# Altium PCB RPi-CM4-Union.PcbDoc
Units mil, origin at the board's own origin, x right, y up, seen from the top; angles counter-clockwise.
Board outline not stored, 2 copper layers (Top Layer, Bottom Layer); 6 components, 0 nets, 204 pads, 0 vias.
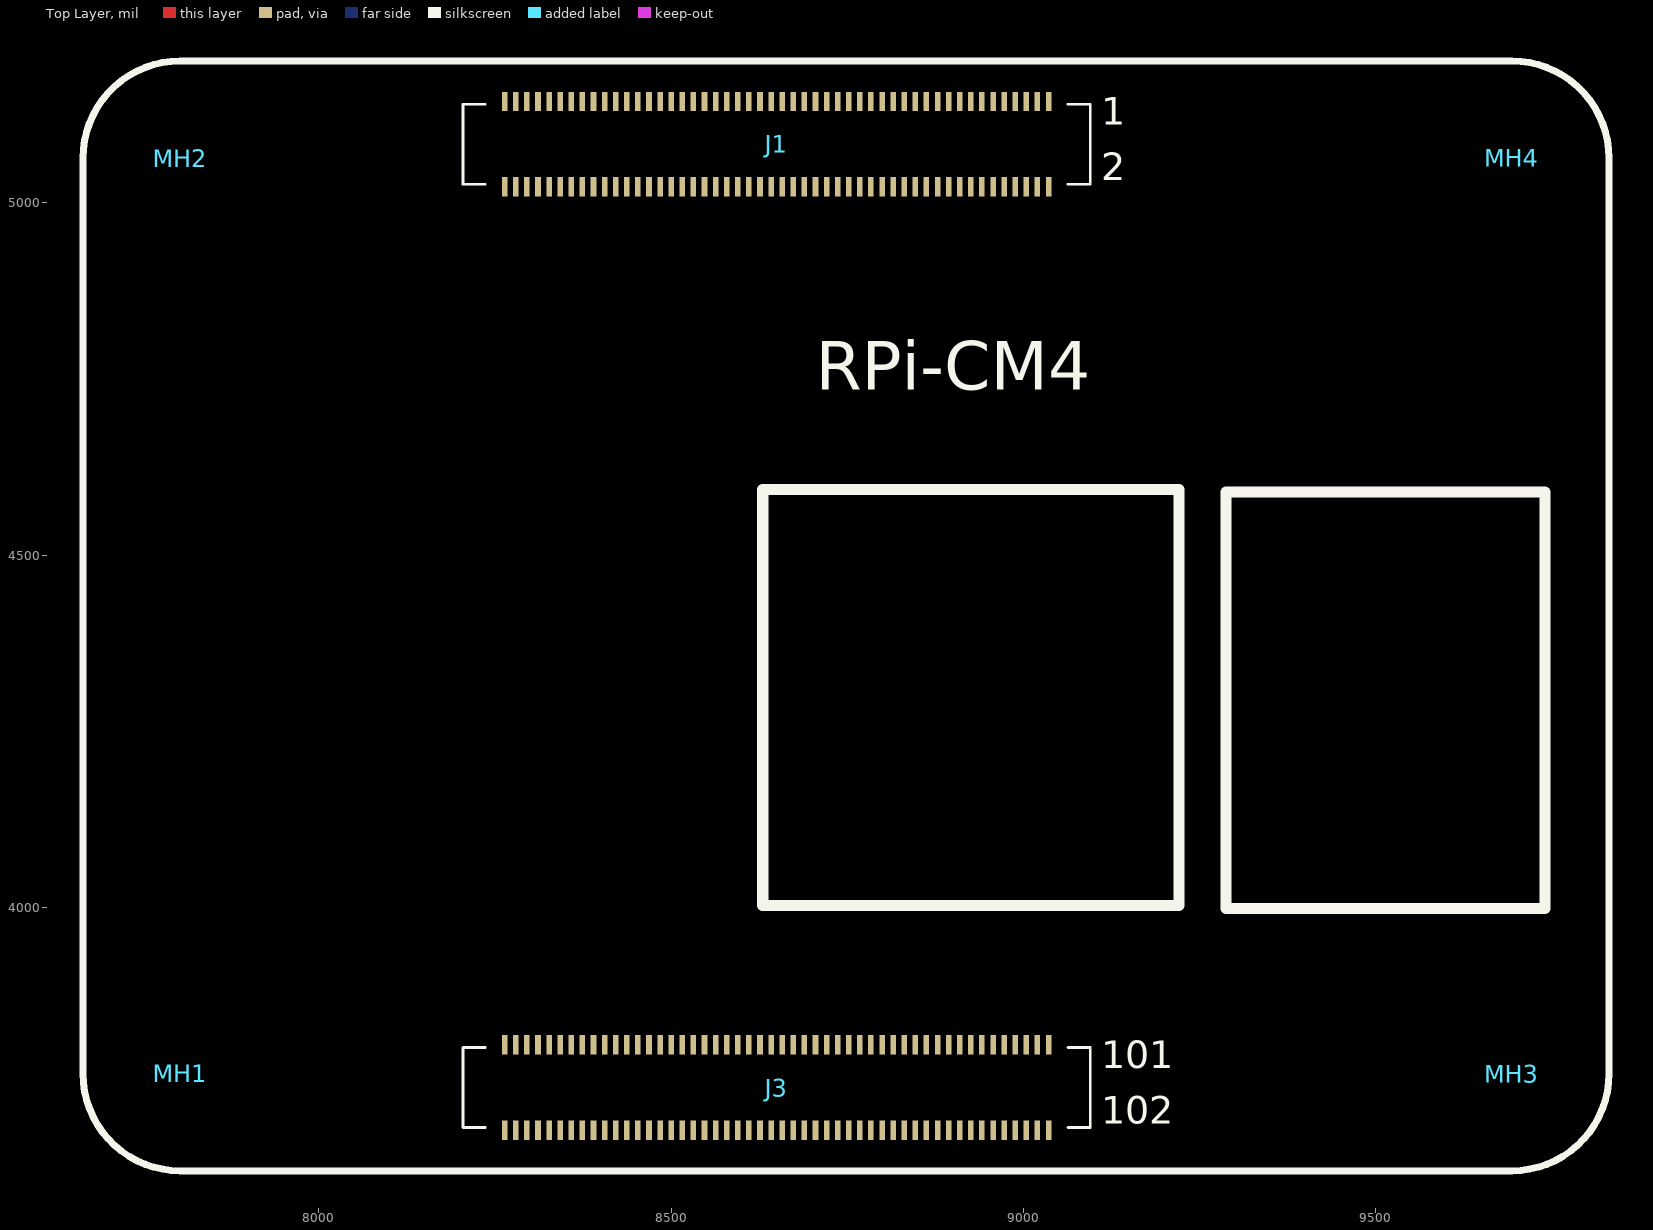
[diagram p0: Top Layer view]
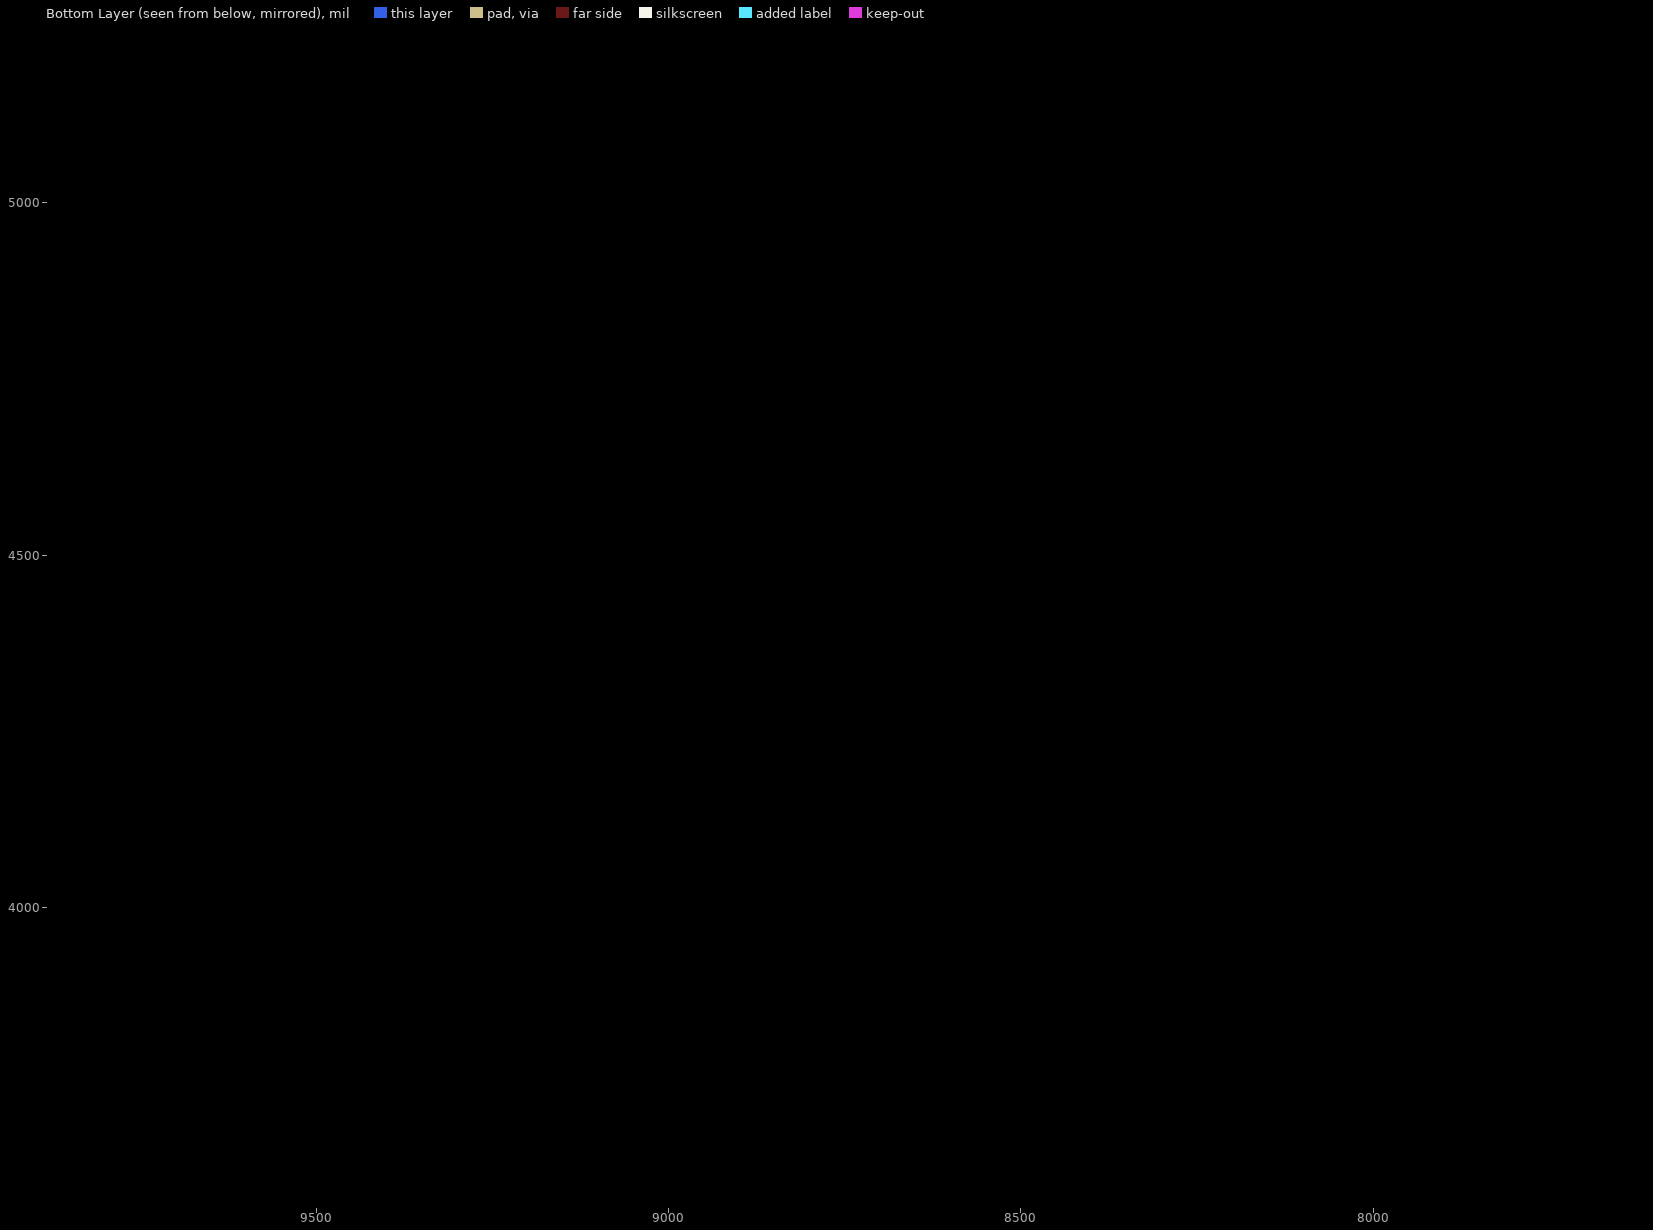
[diagram p1: Bottom Layer view, seen from below]

## Layer stack, top to bottom
Top Solder: solder mask 0.4, Solder Resist, Dk 3.5
Top Layer: signal copper 1.4
Dielectric 1: dielectric 12.6, FR-4, Dk 4.8
Bottom Layer: signal copper 1.4
Bottom Solder: solder mask 0.4, Solder Resist, Dk 3.5

## Components (designator, comment, footprint, x,y, rotation, side; value= is the part's Value field where it differs from the comment)
J1 "DF40C-100DS-0.4V" DF40C100DS04V51(CM4-A) 8649.8,5082.87 r0 top
J3 "DF40C-100DS-0.4V" DF40C100DS04V51(CM4-B) 8649.8,3744.29 r0 top locked
MH1 "MH" M2.5 7803.35,3763.98 r0 top
MH2 "MH" M2.5 7803.35,5063.19 r0 top
MH3 "MH" M2.5 9693.11,3763.98 r0 top
MH4 "MH" M2.5 9693.11,5063.19 r0 top

## Footprints (in the part's own frame and the unit in brackets; to place one, negate y for a bottom-side part, rotate by r counter-clockwise, add the part's x,y. Pads: shape width x height; smd on the part's side, far side on the other; paste and mask are expansions set on the pad)
DF40C100DS04V51(CM4-A) [mm] "DF40C100DS04V51"
  rect 0.2x0.7 smd: 1(9.8,1.54) 2(9.8,-1.54) 3(9.4,1.54) 4(9.4,-1.54) 5(9,1.54) 6(9,-1.54) 7(8.6,1.54) 8(8.6,-1.54) 9(8.2,1.54) 10(8.2,-1.54) 11(7.8,1.54) 12(7.8,-1.54) 13(7.4,1.54) 14(7.4,-1.54) 15(7,1.54) 16(7,-1.54) 17(6.6,1.54) 18(6.6,-1.54) 19(6.2,1.54) 20(6.2,-1.54) 21(5.8,1.54) 22(5.8,-1.54) 23(5.4,1.54) 24(5.4,-1.54) 25(5,1.54) 26(5,-1.54) 27(4.6,1.54) 28(4.6,-1.54) 29(4.2,1.54) 30(4.2,-1.54) 31(3.8,1.54) 32(3.8,-1.54) 33(3.4,1.54) 34(3.4,-1.54) 35(3,1.54) 36(3,-1.54) 37(2.6,1.54) 38(2.6,-1.54) 39(2.2,1.54) 40(2.2,-1.54) 41(1.8,1.54) 42(1.8,-1.54) 43(1.4,1.54) 44(1.4,-1.54) 45(1,1.54) 46(1,-1.54) 47(0.6,1.54) 48(0.6,-1.54) 49(0.2,1.54) 50(0.2,-1.54) 51(-0.2,1.54) 52(-0.2,-1.54) 53(-0.6,1.54) 54(-0.6,-1.54) 55(-1,1.54) 56(-1,-1.54) 57(-1.4,1.54) 58(-1.4,-1.54) 59(-1.8,1.54) 60(-1.8,-1.54) 61(-2.2,1.54) 62(-2.2,-1.54) 63(-2.6,1.54) 64(-2.6,-1.54) 65(-3,1.54) 66(-3,-1.54) 67(-3.4,1.54) 68(-3.4,-1.54) 69(-3.8,1.54) 70(-3.8,-1.54) 71(-4.2,1.54) 72(-4.2,-1.54) 73(-4.6,1.54) 74(-4.6,-1.54) 75(-5,1.54) 76(-5,-1.54) 77(-5.4,1.54) 78(-5.4,-1.54) 79(-5.8,1.54) 80(-5.8,-1.54) 81(-6.2,1.54) 82(-6.2,-1.54) 83(-6.6,1.54) 84(-6.6,-1.54) 85(-7,1.54) 86(-7,-1.54) 87(-7.4,1.54) 88(-7.4,-1.54) 89(-7.8,1.54) 90(-7.8,-1.54) 91(-8.2,1.54) 92(-8.2,-1.54) 93(-8.6,1.54) 94(-8.6,-1.54) 95(-9,1.54) 96(-9,-1.54) 97(-9.4,1.54) 98(-9.4,-1.54) 99(-9.8,1.54) 100(-9.8,-1.54)
  silkscreen extent -11.3,-1.44 11.3,1.44, body extent -11.29,-1.69 11.31,1.69, height 1.4
DF40C100DS04V51(CM4-B) [mm] "DF40C100DS04V51"
  rect 0.2x0.7 smd: 101(9.8,1.54) 102(9.8,-1.54) 103(9.4,1.54) 104(9.4,-1.54) 105(9,1.54) 106(9,-1.54) 107(8.6,1.54) 108(8.6,-1.54) 109(8.2,1.54) 110(8.2,-1.54) 111(7.8,1.54) 112(7.8,-1.54) 113(7.4,1.54) 114(7.4,-1.54) 115(7,1.54) 116(7,-1.54) 117(6.6,1.54) 118(6.6,-1.54) 119(6.2,1.54) 120(6.2,-1.54) 121(5.8,1.54) 122(5.8,-1.54) 123(5.4,1.54) 124(5.4,-1.54) 125(5,1.54) 126(5,-1.54) 127(4.6,1.54) 128(4.6,-1.54) 129(4.2,1.54) 130(4.2,-1.54) 131(3.8,1.54) 132(3.8,-1.54) 133(3.4,1.54) 134(3.4,-1.54) 135(3,1.54) 136(3,-1.54) 137(2.6,1.54) 138(2.6,-1.54) 139(2.2,1.54) 140(2.2,-1.54) 141(1.8,1.54) 142(1.8,-1.54) 143(1.4,1.54) 144(1.4,-1.54) 145(1,1.54) 146(1,-1.54) 147(0.6,1.54) 148(0.6,-1.54) 149(0.2,1.54) 150(0.2,-1.54) 151(-0.2,1.54) 152(-0.2,-1.54) 153(-0.6,1.54) 154(-0.6,-1.54) 155(-1,1.54) 156(-1,-1.54) 157(-1.4,1.54) 158(-1.4,-1.54) 159(-1.8,1.54) 160(-1.8,-1.54) 161(-2.2,1.54) 162(-2.2,-1.54) 163(-2.6,1.54) 164(-2.6,-1.54) 165(-3,1.54) 166(-3,-1.54) 167(-3.4,1.54) 168(-3.4,-1.54) 169(-3.8,1.54) 170(-3.8,-1.54) 171(-4.2,1.54) 172(-4.2,-1.54) 173(-4.6,1.54) 174(-4.6,-1.54) 175(-5,1.54) 176(-5,-1.54) 177(-5.4,1.54) 178(-5.4,-1.54) 179(-5.8,1.54) 180(-5.8,-1.54) 181(-6.2,1.54) 182(-6.2,-1.54) 183(-6.6,1.54) 184(-6.6,-1.54) 185(-7,1.54) 186(-7,-1.54) 187(-7.4,1.54) 188(-7.4,-1.54) 189(-7.8,1.54) 190(-7.8,-1.54) 191(-8.2,1.54) 192(-8.2,-1.54) 193(-8.6,1.54) 194(-8.6,-1.54) 195(-9,1.54) 196(-9,-1.54) 197(-9.4,1.54) 198(-9.4,-1.54) 199(-9.8,1.54) 200(-9.8,-1.54)
  silkscreen extent -11.3,-1.44 11.3,1.44, body extent -11.3,-1.7 11.3,1.68, height 1.4
M2.5 [mm]
  round 2.5 hole 2.7 unplated paste+0 mask+1.75: M2.5(0,0)
  Multi-Layer pour cut-out: 0,-3 -0.197,-3 -0.587,-2.949 -0.966,-2.847 -1.33,-2.696 -1.67,-2.5 -1.982,-2.26 -2.26,-1.982 -2.5,-1.67 -2.696,-1.33 -2.847,-0.966 -2.949,-0.587 -3,-0.197 -3,0 -3,0.197 -2.949,0.587 -2.847,0.966 -2.696,1.33 -2.5,1.67 -2.26,1.982 -1.982,2.26 -1.67,2.5 -1.33,2.696 -0.966,2.847 -0.587,2.949 -0.197,3 0,3 0.197,3 0.587,2.949 0.966,2.847 1.33,2.696 1.67,2.5 1.982,2.26 2.26,1.982 2.5,1.67 2.696,1.33 2.847,0.966 2.949,0.587 3,0.197 3,0 3,-0.197 2.949,-0.587 2.847,-0.966 2.696,-1.33 2.5,-1.67 2.26,-1.982 1.982,-2.26 1.67,-2.5 1.33,-2.696 0.966,-2.847 0.587,-2.949 0.197,-3 0,-3

## Part data
J1: library part Module_RPi-CM4-GPIO, "树莓派CM4-A GPIO  DF40C-100DS-0.4V座子"
J3: library part Module_RPi-CM4-HighSpeedSerial, "树莓派CM4-B High Speed Serial  DF40C-100DS-0.4V座子"
MH1 MH2 MH3 MH4: "安装孔-附加安装铜柱信息"

## Nets (pads, with @x,y where several pads share a name; then routed paths per layer and width w, separated by ;. In a path a pad name is that pad's centre, name@x,y a point inside that pad or via, vN(x,y) a via of type N, cw(c..) or ccw(c..) an arc to the next point about the centre after c; other vN are vias at no path point)
pads on no net: J1.1 J1.2 J1.3 J1.4 J1.5 J1.6 J1.7 J1.8 J1.9 J1.10 J1.11 J1.12 J1.13 J1.14 J1.15 J1.16 J1.17 J1.18 J1.19 J1.20 J1.21 J1.22 J1.23 J1.24 J1.25 J1.26 J1.27 J1.28 J1.29 J1.30 J1.31 J1.32 J1.33 J1.34 J1.35 J1.36 J1.37 J1.38 J1.39 J1.40 J1.41 J1.42 J1.43 J1.44 J1.45 J1.46 J1.47 J1.48 J1.49 J1.50 J1.51 J1.52 J1.53 J1.54 J1.55 J1.56 J1.57 J1.58 J1.59 J1.60 J1.61 J1.62 J1.63 J1.64 J1.65 J1.66 J1.67 J1.68 J1.69 J1.70 J1.71 J1.72 J1.73 J1.74 J1.75 J1.76 J1.77 J1.78 J1.79 J1.80 J1.81 J1.82 J1.83 J1.84 J1.85 J1.86 J1.87 J1.88 J1.89 J1.90 J1.91 J1.92 J1.93 J1.94 J1.95 J1.96 J1.97 J1.98 J1.99 J1.100 J3.101 J3.102 J3.103 J3.104 J3.105 J3.106 J3.107 J3.108 J3.109 J3.110 J3.111 J3.112 J3.113 J3.114 J3.115 J3.116 J3.117 J3.118 J3.119 J3.120 J3.121 J3.122 J3.123 J3.124 J3.125 J3.126 J3.127 J3.128 J3.129 J3.130 J3.131 J3.132 J3.133 J3.134 J3.135 J3.136 J3.137 J3.138 J3.139 J3.140 J3.141 J3.142 J3.143 J3.144 J3.145 J3.146 J3.147 J3.148 J3.149 J3.150 J3.151 J3.152 J3.153 J3.154 J3.155 J3.156 J3.157 J3.158 J3.159 J3.160 J3.161 J3.162 J3.163 J3.164 J3.165 J3.166 J3.167 J3.168 J3.169 J3.170 J3.171 J3.172 J3.173 J3.174 J3.175 J3.176 J3.177 J3.178 J3.179 J3.180 J3.181 J3.182 J3.183 J3.184 J3.185 J3.186 J3.187 J3.188 J3.189 J3.190 J3.191 J3.192 J3.193 J3.194 J3.195 J3.196 J3.197 J3.198 J3.199 J3.200 MH1.M2.5 MH2.M2.5 MH3.M2.5 MH4.M2.5

## Silkscreen, mask and mechanical layers (free items; w line width, h text height)
Top Overlay:
  lines w10: 7665.55,3763.98 ccw(c7803.35,3763.98) 7803.35,3626.18 9693.11,3626.18 ccw(c9693.11,3763.98) 9830.91,3763.98 9830.91,5063.19 ccw(c9693.11,5063.19) 9693.11,5200.98 7803.35,5200.98 ccw(c7803.35,5063.19) 7665.55,5063.19 7665.55,3763.98
  lines w15.75: 8630.12,4002.56 8630.12,4593.11 9220.68,4593.11 9220.68,4002.56 8630.12,4002.56 ; 9287.6,3998.62 9287.6,4589.17 9740.35,4589.17 9740.35,3998.62 9287.6,3998.62
  text "RPi-CM4" at 8705.58,4712.01 h118.11

## Text inside footprints (layer, text, board x,y; h text height)
J1: Top Overlay "1" at 9110.43,5110.43 h39.37; Top Overlay "2" at 9110.43,5031.69 h39.37
J3: Top Overlay "101" at 9110.43,3771.85 h39.37; Top Overlay "102" at 9110.43,3693.11 h39.37